# Altium PCB PCB.PcbDoc
Units mm, origin at the board's own origin, x right, y up, seen from the top; angles counter-clockwise.
Board outline 30 x 35.5 mm, 4 copper layers (Top Layer, GND Layer, PWR Layer, Bottom Layer), stack 1.57 mm thick; 43 components, 55 nets, 246 pads, 101 vias.
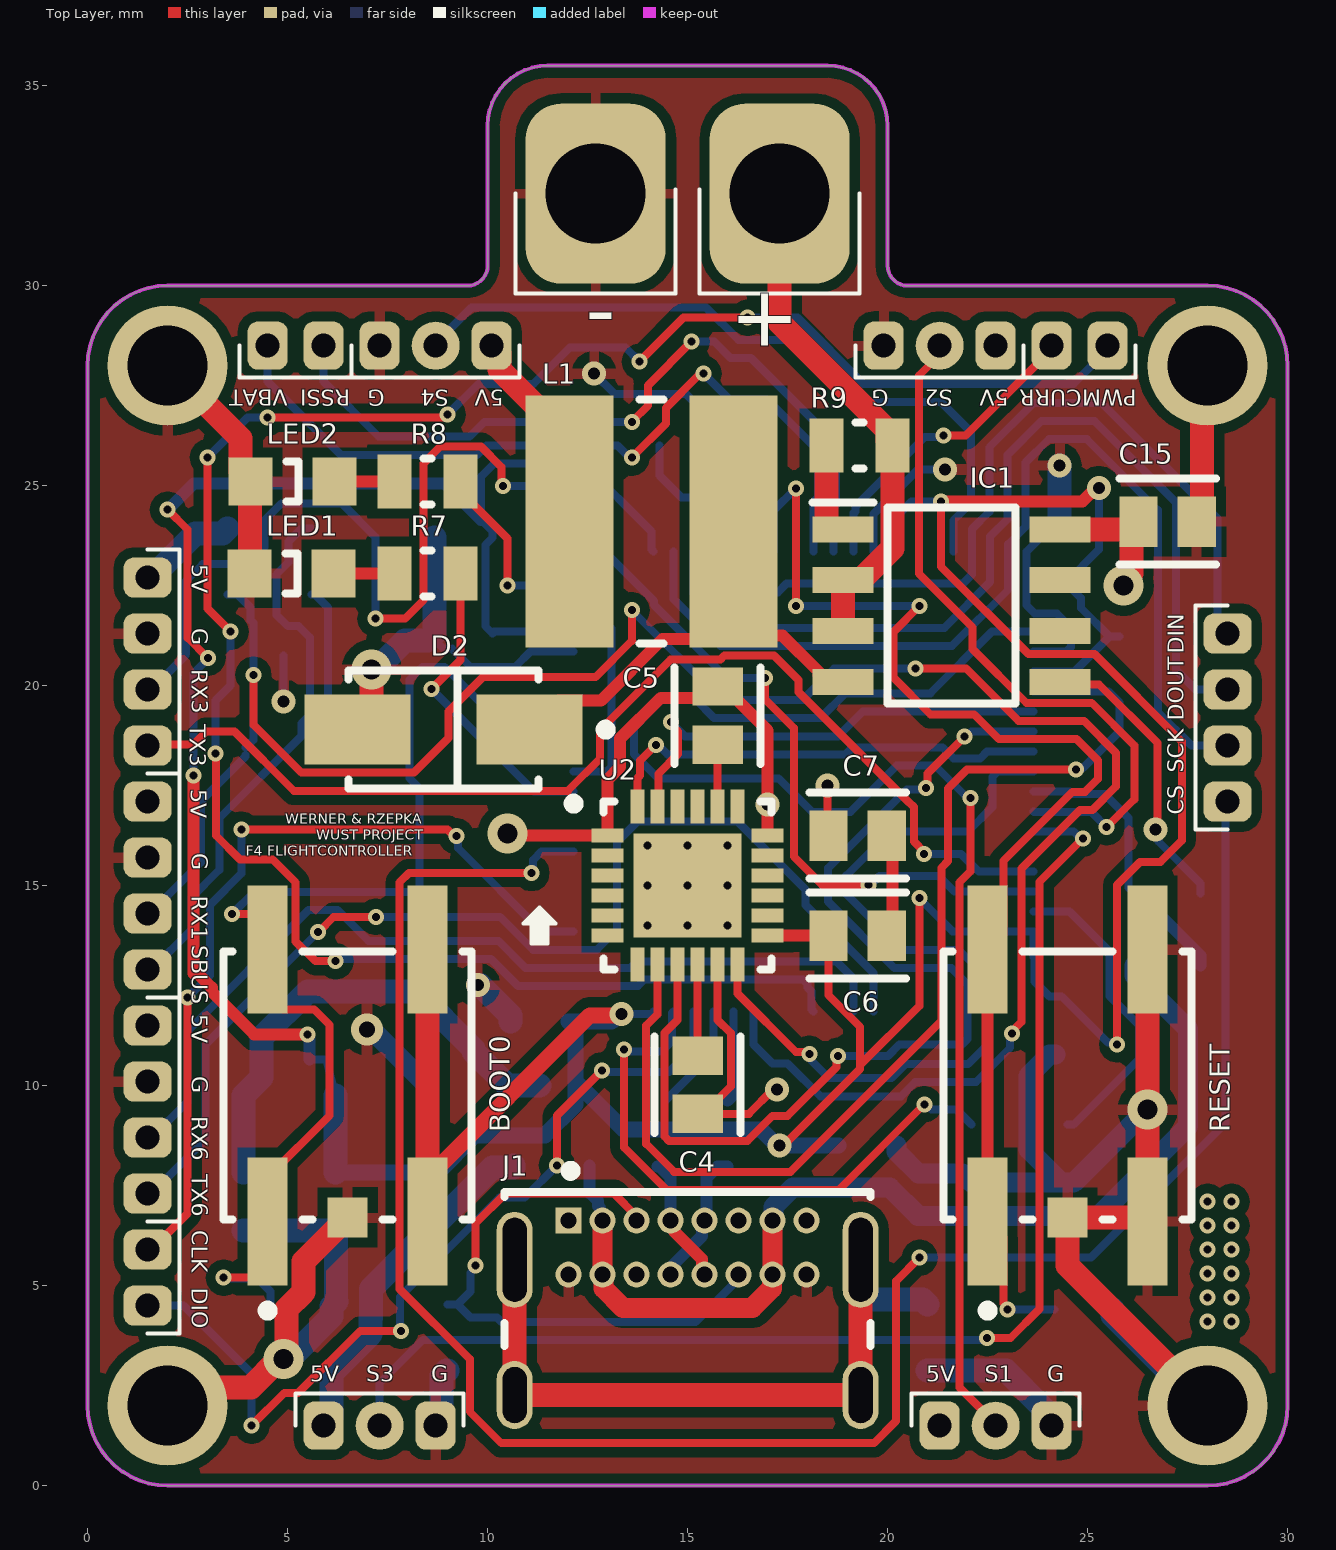
[diagram p0: Top Layer view]
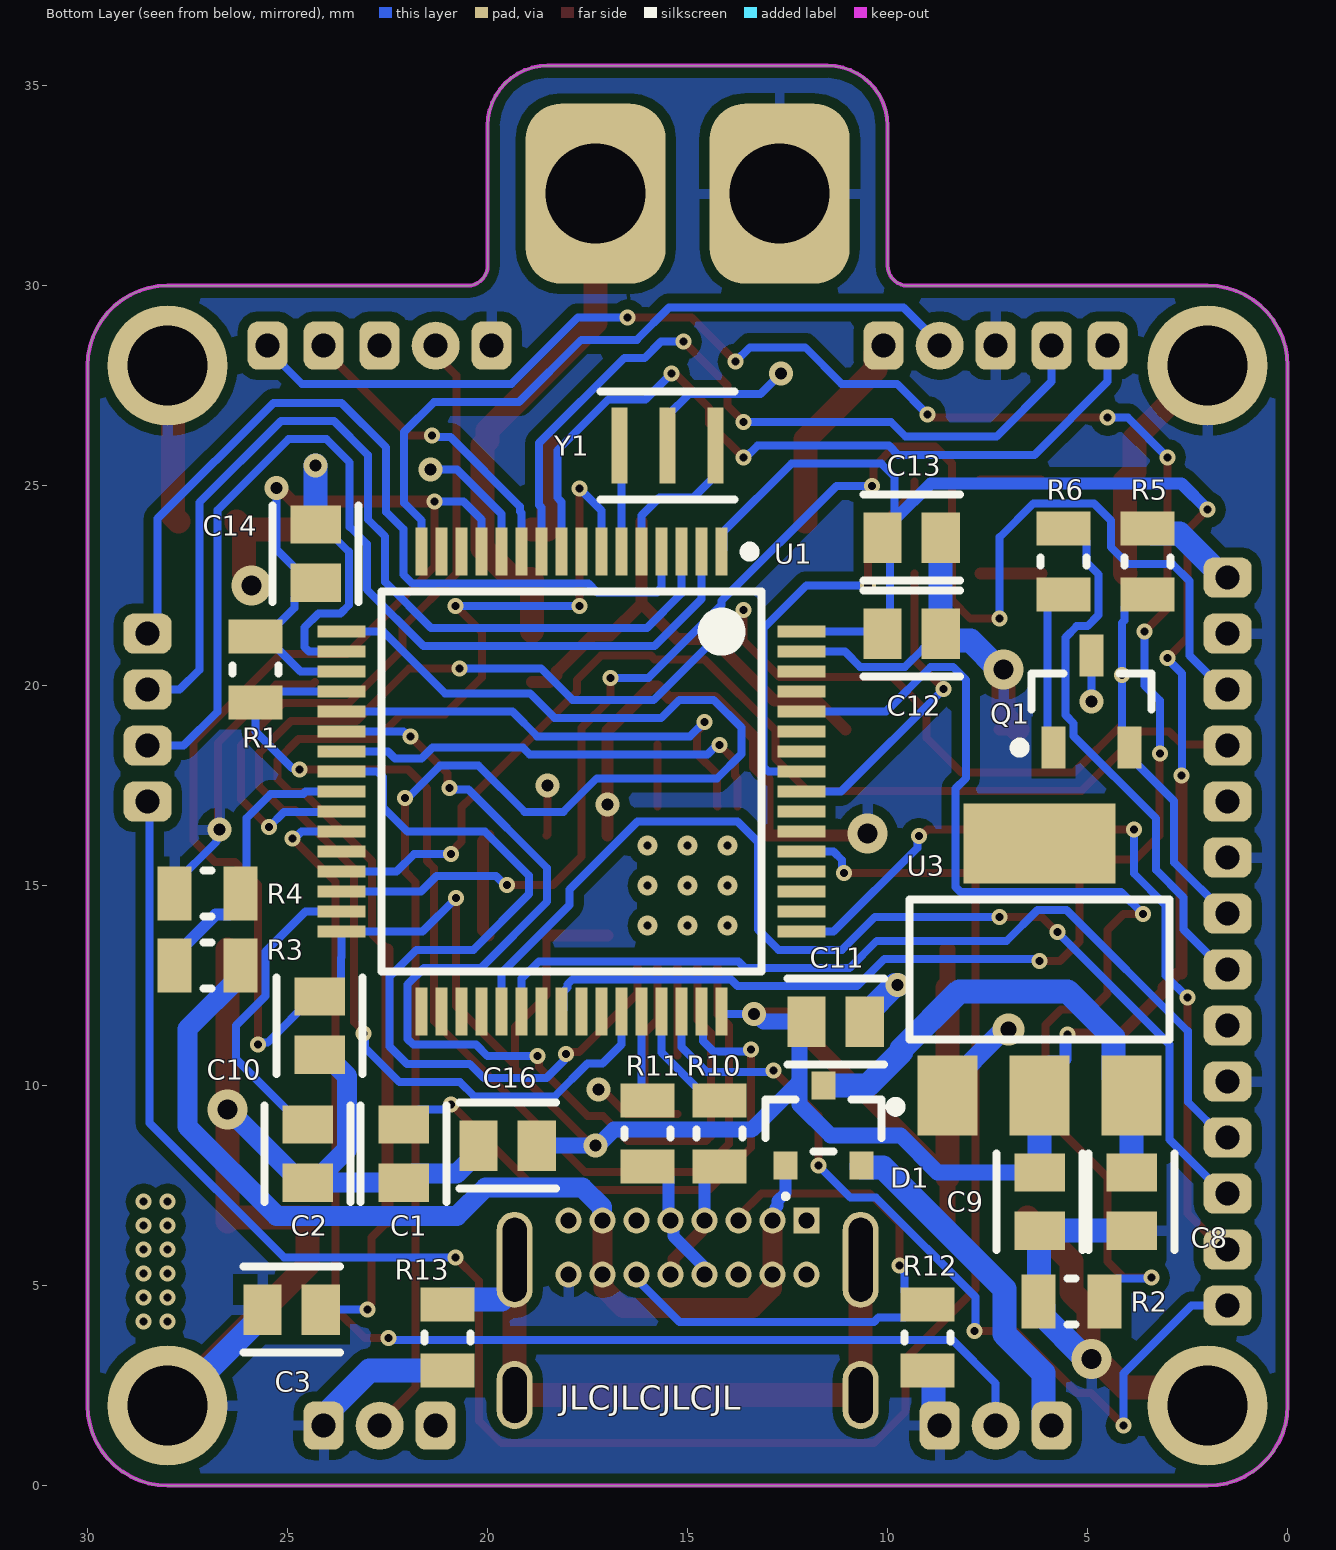
[diagram p1: Bottom Layer view, seen from below]
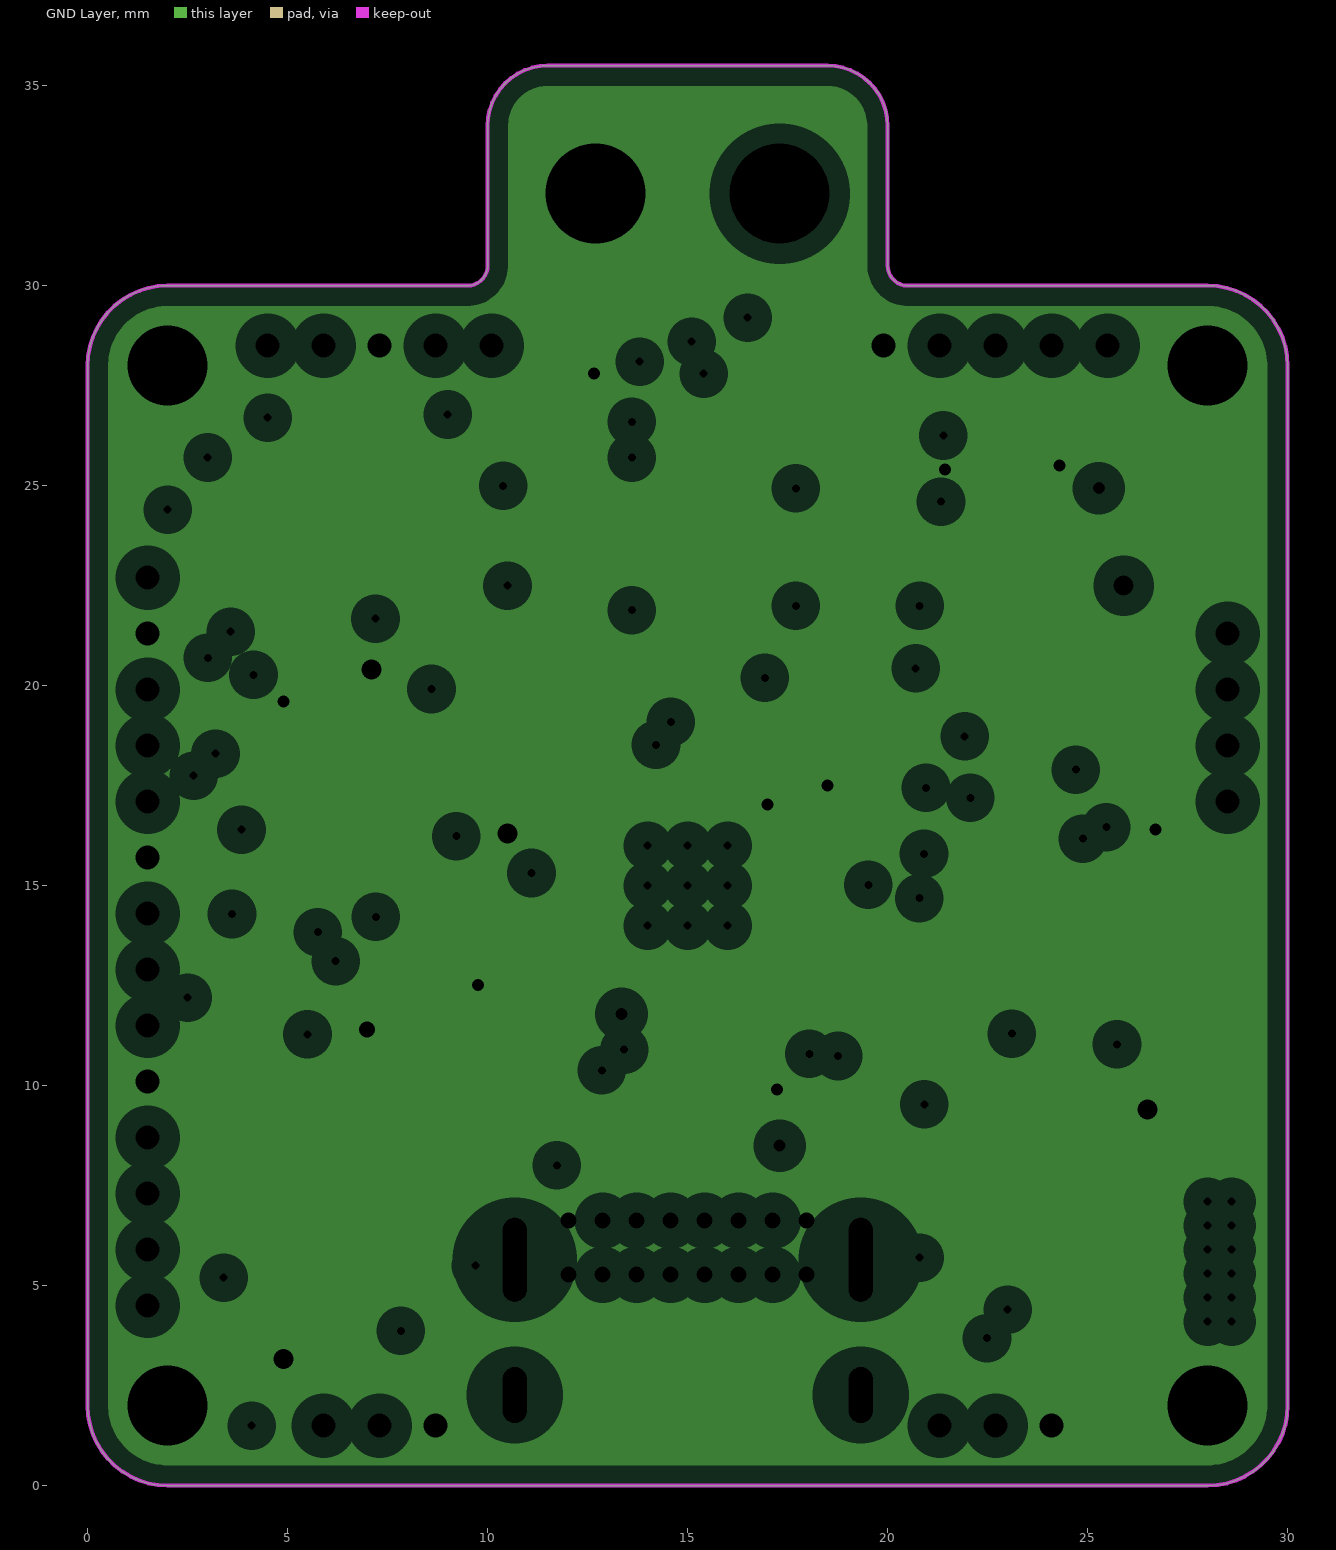
[diagram p2: GND Layer, clearances drawn from the general rule]
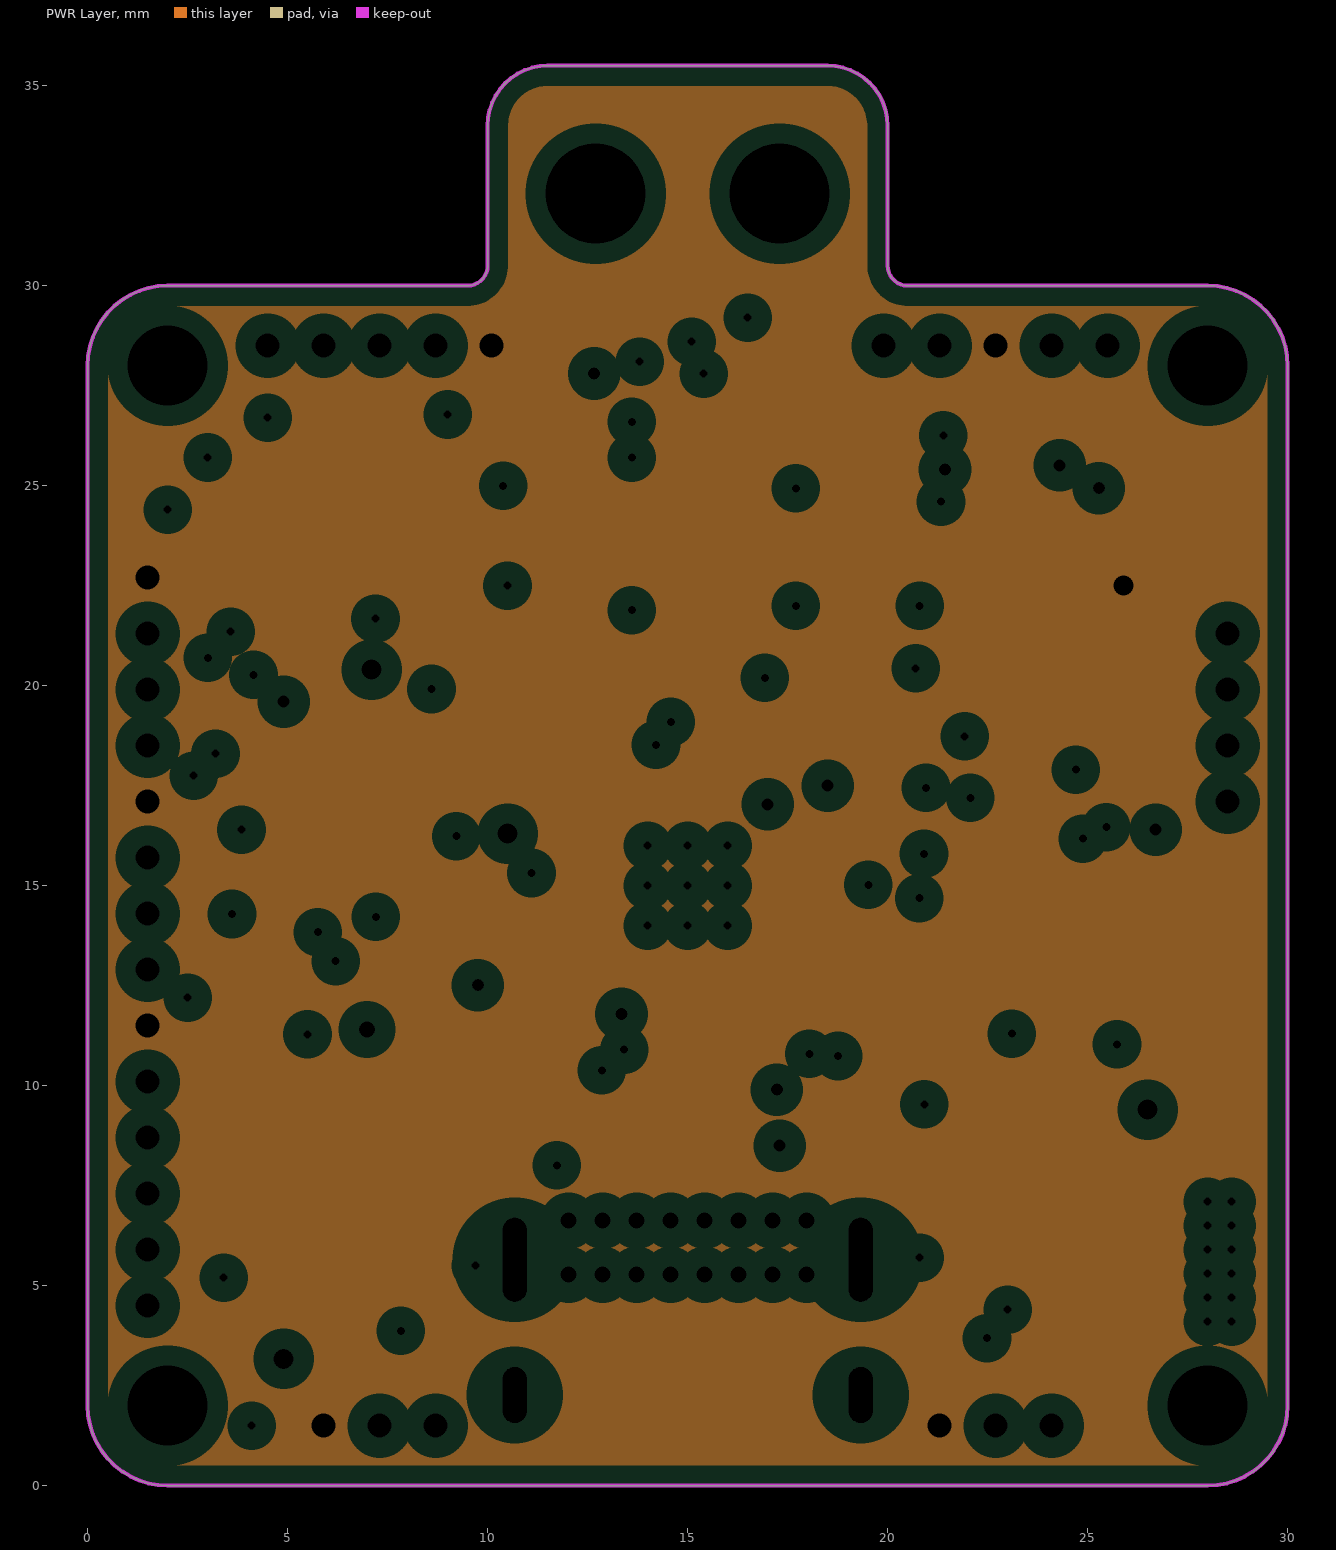
[diagram p3: PWR Layer, clearances drawn from the general rule]
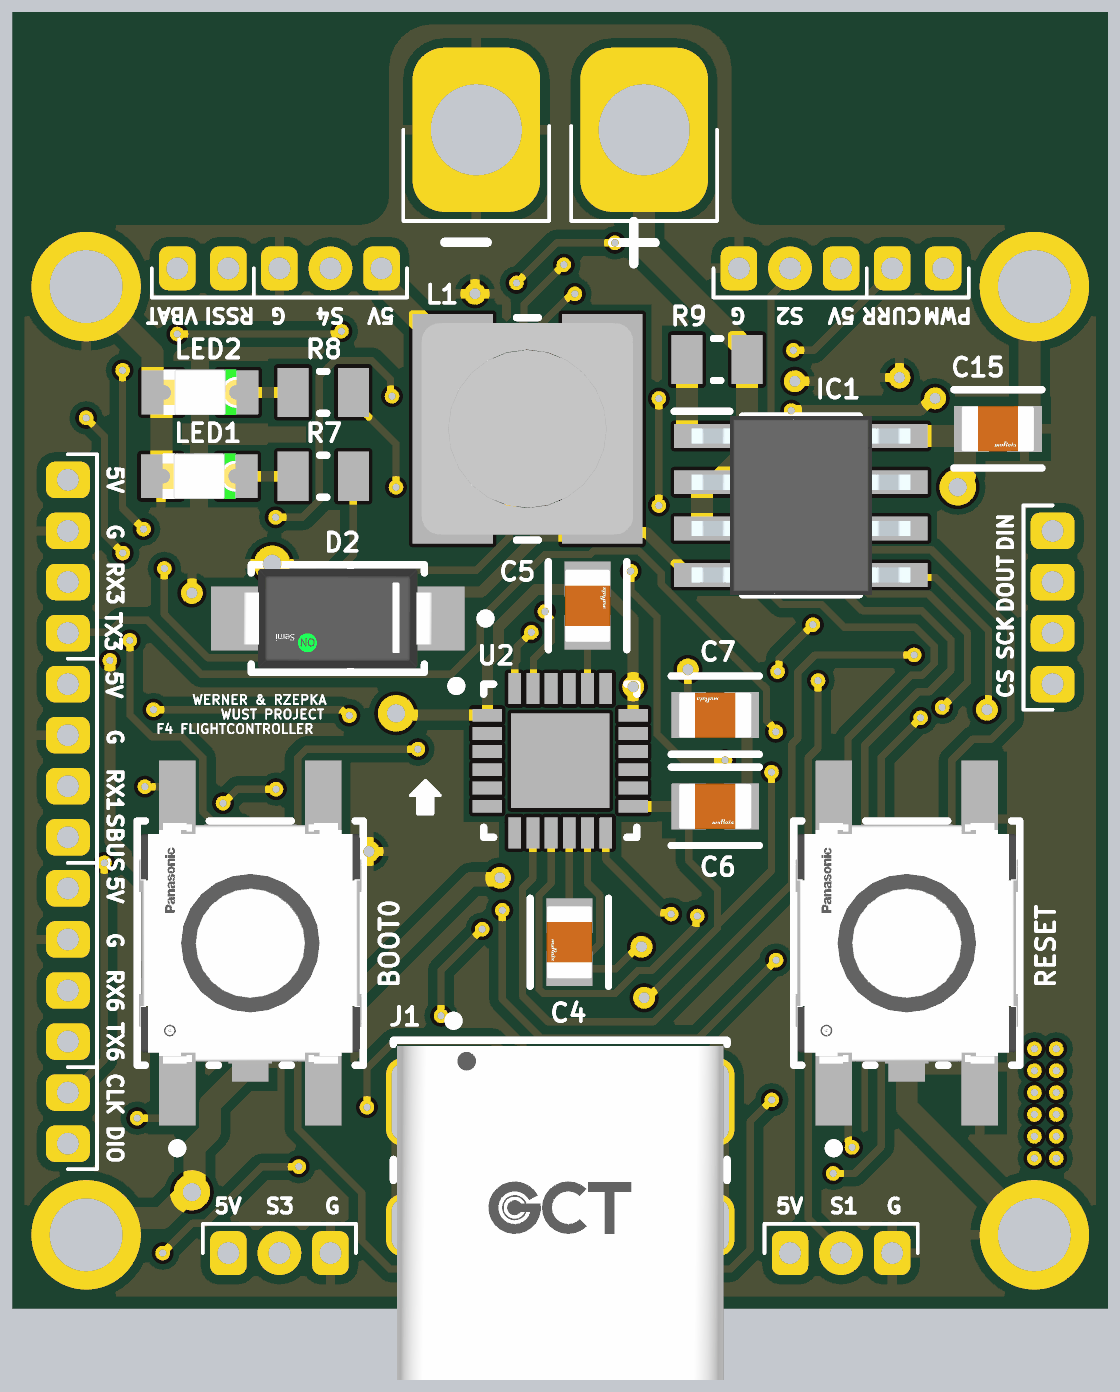
[diagram p4: 3D render of the assembled board from above, using the file's embedded part models]

## Layer stack, top to bottom
Top Solder: solder mask 0.0254, SM-001, Dk 3.8
Top Layer: signal copper 0.035
Dielectric 2: prepreg 0.2, PP-022, Dk 4.6
GND Layer: plane copper 0.0175, net GND
Dielectric 3: core 1.065, Core-042, Dk 4.6
PWR Layer: plane copper 0.0175, net +5
Dielectric 4: prepreg 0.2, PP-022, Dk 4.6
Bottom Layer: signal copper 0.035
Bottom Solder: solder mask 0.0254, SM-001, Dk 3.8

## Board outline
2,0 cw(c2,2) 0,2 0,28 cw(c2,28) 2,30 9.5,30 ccw(c9.5,30.5) 10,30.5 10,34 cw(c11.5,34) 11.5,35.5 18.5,35.5 cw(c18.5,34) 20,34 20,30.5 ccw(c20.5,30.5) 20.5,30 28,30 cw(c28,28) 30,28 30,2 cw(c28,2) 28,0

## Design rules (kind name [scope] priority, off if disabled: settings)
Clearance [All] p1: gap=0.254 ignorepadtopadclearanceinfootprint=TRUE except(0.1: Arc-SMDPad Track-SMDPad; 0.25: Arc-Hole Track-Hole SMDPad-Hole THPad-Hole Via-Hole Fill-Hole Poly-Hole Region-Hole Text-Hole)
PlaneClearance [All] p1: clearance=0.508
PlaneConnect [All] p1: planeconnectstyle=Relief reliefexpansion=0.508 reliefentries=4 reliefconductorwidth=0.254 reliefairgap=0.254
PolygonConnect [All] p1: connectstyle=Relief reliefconductorwidth=0.254 reliefentries=4 polygonreliefangle="90 Angle" airgapwidth=0.254
RoutingVias [All] p1: holewidth=0.3 width=0.6 viastyle="Through Hole" minholewidth=0.2 minwidth=0.4 maxholewidth=0.5 maxwidth=1
SolderMaskExpansion [All] p1: expansion=0.102 istentingtop=FALSE
ViasUnderSMD [All] p1: allowed=FALSE
Width [All] p1: maxlimit=0.6 minlimit=0.1 preferedwidth=0.2
28 further rules are at their usual default settings.

## Classes and differential pairs
component class "USB2.0 Type C Connection": C16 J1 R10 R11 R12 R13
component class "SBUS Inverter": Q1 R5 R6
component class "MPU-6000 Gyro": C4 C5 C6 C7 U2
component class "MCU Power": C10 C11 C12 C13 C14
component class "LED Status": LED1 LED2 R7 R8
component class "F4 DFC": BOOT0 C1 C2 C3 R1 R2 R3 R4 RESET U1 Y1
component class "5V Regulator": C15 D2 IC1 L1 R9
component class "3.3V Regulator": C8 C9 D1 U3

## Components (designator, comment, footprint, x,y, rotation, side; value= is the part's Value field where it differs from the comment)
BOOT0 "EVQQ2202W" FP-EVQQ2202W-MFG 6.5,10 r270 top
C1 "Cap 0805" FP-GRM216-0_1-IPC_C 22.1,8.3 r270 bottom value=2.2uF
C2 "Cap 0805" FP-GRM216-0_1-IPC_C 24.5,8.3 r270 bottom value=2.2uF
C3 "Cap 0805" FP-GRM216-0_1-IPC_C 24.9,4.4 r0 bottom value=0.1uF
C4 "Cap 0805" FP-GRM216-0_1-IPC_C 15.25,10.023 r270 top value=0.1uF
C5 "Cap 0805" FP-GRM216-0_1-IPC_C 15.75,19.25 r90 top value=2.2nF
C6 "Cap 0805" FP-GRM216-0_1-IPC_C 19.25,13.75 r0 top value=0.1uF
C7 "Cap 0805" FP-GRM216-0_1-IPC_C 19.25,16.25 r180 top value=1uF
C8 "Cap 0805" FP-GRM216-0_1-IPC_C 3.9,7.1 r270 bottom value=10uF
C9 "Cap 0805" FP-GRM216-0_1-IPC_C 6.2,7.1 r270 bottom value=10uF
C10 "Cap 0805" FP-GRM216-0_1-IPC_C 24.2,11.5 r270 bottom value=100nF
C11 "Cap 0805" FP-GRM216-0_1-IPC_C 11.3,11.6 r180 bottom value=100nF
C12 "Cap 0805" FP-GRM216-0_1-IPC_C 9.4,21.3 r180 bottom value=100nF
C13 "Cap 0805" FP-GRM216-0_1-IPC_C 9.4,23.7 r180 bottom value=100nF
C14 "Cap 0805" FP-GRM216-0_1-IPC_C 24.3,23.3 r90 bottom value=100nF
C15 "Cap 0805" FP-GRM216-0_1-IPC_C 27,24.1 r0 top value=10uF
C16 "Cap 0805" FP-GRM216-0_1-IPC_C 19.5,8.5 r0 bottom value=0.1uF
D1 "BAT54C" NXP-SOT23-3_V 11.6,9 r0 bottom
D2 "SS14" FP-403AE-MFG 8.9,18.9 r0 top
IC1 "LT1110CS8-5#PBF" SOIC127P599X175-8N 21.6,22 r0 top
J1 "USB4085-GF-A" FP-USB4085-GF-A-MFG 15,2.6 r0 top
L1 "744053470" WE-TPC-5828-LH 14.1,24.1 r180 top
LED1 "LED 0805" 0805_A 5.1,22.8 r180 top
LED2 "LED 0805" 0805_A 5.125,25.1 r180 top
Q1 "BC857C" INF-SOT23_N 4.9,19.6 r90 bottom
R1 "Res 0805" RESC2013X50X30LL20T20 25.8,20.4 r90 bottom value=10K
R2 "Res 0805" RESC2013X50X30LL20T20 5.4,4.6 r180 bottom value=10K
R3 "Res 0805" RESC2013X50X30LL20T20 27,13 r0 bottom value=10K
R4 "Res 0805" RESC2013X50X30LL20T20 27,14.8 r180 bottom value=10K
R5 "Res 0805" RESC2013X50X30LL20T20 3.5,23.1 r90 bottom value=10K
R6 "Res 0805" RESC2013X50X30LL20T20 5.6,23.1 r90 bottom value=4.7K
R7 "Res 0805" RESC2013X50X30LL20T20 8.5,22.8 r180 top value=1K
R8 "Res 0805" RESC2013X50X30LL20T20 8.5,25.1 r180 top value=1K
R9 "Res 0805" RESC2013X50X30LL20T20 19.3,26 r0 top value=220
R10 "Res 0805" RESC2013X50X30LL20T20 14.2,8.8 r270 bottom value=22
R11 "Res 0805" RESC2013X50X30LL20T20 16,8.8 r270 bottom value=22
R12 "Res 0805" RESC2013X50X30LL20T20 9,3.7 r270 bottom value=5.1K
R13 "Res 0805" RESC2013X50X30LL20T20 21,3.7 r270 bottom value=1M
RESET "EVQQ2202W" FP-EVQQ2202W-MFG 24.5,10 r270 top
U1 "STM32F405RGT6" STM-LQFP64_V 17.9,17.6 r270 bottom
U2 "MPU-6000" INSE-QFN-24_V 15,15 r0 top
U3 "NCP1117ST33T3G" ONSC-SOT-223-4-318H-01_A_V 6.2,12.9 r90 bottom
Y1 "CSTNE8M00GH5C000R0" FP-CSTNE8M00GH5C000R0-MFG 15.5,26 r180 bottom value=8MHz

## Footprints (in the part's own frame and the unit in brackets; to place one, negate y for a bottom-side part, rotate by r counter-clockwise, add the part's x,y. Pads: shape width x height; smd on the part's side, far side on the other; paste and mask are expansions set on the pad)
0805_A [mm] "Chip LED, 2-Leads, Body 2.0x1.3mm, IPC Medium Density"
  rect 1.1x1.2 smd: 1(-1.05,0) 2(1.05,0)
  silkscreen extent -0.15,-0.5 0.15,0.5, body extent -1,-0.62 1,0.63, height 0.68
FP-403AE-MFG [mm]
  rect 2.65x1.75 smd paste+0 mask+0: 1(-2.15,0) 2(2.15,0)
  silkscreen extent -2.37,-1.48 4.18,1.48, body extent -3.57,-1.58 3.57,1.58, height 0.25
FP-CSTNE8M00GH5C000R0-MFG [mm]
  rect 0.4x1.9 smd paste+0 mask+0: 1(1.2,0) 2(0,0) 3(-1.2,0)
  silkscreen extent -1.68,-1.35 1.68,1.35, body extent -1.6,-0.65 1.6,0.65, height 0.8
FP-EVQQ2202W-MFG [mm]
  rect 1x1 smd paste+0 mask+0: 1(3.3,0)
  rect 3.2x1 smd paste+0 mask+0: A(3.4,-2) A'(-3.4,-2) B(3.4,2) B'(-3.4,2)
  silkscreen extent -3.35,-3.1 5.75,3.1, body extent -5.1,-3.2 5.1,3.2, height 0.25
FP-GRM216-0_1-IPC_C [mm]
  rect 0.958x1.261 smd paste+0 mask+0: 1(-0.727,0) 2(0.727,0)
  silkscreen extent -1.21,-1.07 1.21,1.07, body extent -1,-0.63 1,0.63, height 0.7
FP-USB4085-GF-A-MFG [mm]
  rrect100% 0.9x2.4 hole 2.1 slot 0.6 at 0 deg paste-1000 mask+0: 1(-4.325,3.045) 2(4.325,3.045)
  rrect100% 0.9x1.7 hole 1.4 slot 0.6 at 0 deg paste-1000 mask+0: 3(-4.325,-0.335) 4(4.325,-0.335)
  rect 0.65x0.65 hole 0.4 paste-1000 mask+0: A1(-2.975,4.025)
  round 0.65 hole 0.4 paste-1000 mask+0: A4(-2.125,4.025) A5(-1.275,4.025) A6(-0.425,4.025) A7(0.425,4.025) A8(1.275,4.025) A9(2.125,4.025) A12(2.975,4.025) B1(2.975,2.675) B4(2.125,2.675) B5(1.275,2.675) B6(0.425,2.675) B7(-0.425,2.675) B8(-1.275,2.675) B9(-2.125,2.675) B12(-2.975,2.675)
  silkscreen extent -4.57,0.89 4.57,5.39, body extent -4.87,-4.83 4.87,4.83, height 0.25
INF-SOT23_N [mm] "SOT23, 3-Leads, Body 2.9x1.3 mm, Pitch 0.95 mm, IPC Medium Density"
  rect 1.05x0.6 smd: 1(-1.15,0.95) 2(-1.15,-0.95) 3(1.15,0)
  silkscreen extent -1.27,-1.5 0.7,1.93, body extent -0.7,-1.5 0.7,1.5, height 1.1
INSE-QFN-24_V [mm] "QFN, 24-Leads, Body 4.00x4.00mm, Pitch 0.50mm, Thermal Pad 2.7x2.6mm"
  rect 0.8x0.35 smd: 1(-2,1.25) 2(-2,0.75) 3(-2,0.25) 4(-2,-0.25) 5(-2,-0.75) 6(-2,-1.25) 13(2,-1.25) 14(2,-0.75) 15(2,-0.25) 16(2,0.25) 17(2,0.75) 18(2,1.25)
  rect 0.35x0.85 smd: 7(-1.25,-1.975) 8(-0.75,-1.975) 9(-0.25,-1.975) 10(0.25,-1.975) 11(0.75,-1.975) 12(1.25,-1.975) 19(1.25,1.975) 20(0.75,1.975) 21(0.25,1.975) 22(-0.25,1.975) 23(-0.75,1.975) 24(-1.25,1.975)
  rect 2.7x2.6 smd: 25(0,0)
  silkscreen extent -2.97,-2.1 2.1,2.17, body extent -2,-2 2,2, height 0.95
NXP-SOT23-3_V [mm] "SOT23, 3-Leads, Body 1.3x2.9mm, Pitch 0.95mm"
  rect 0.6x0.7 smd paste-0.05: 1(0.95,1) 2(-0.95,1) 3(0,-1)
  silkscreen extent -1.45,-0.65 1.45,1.79, body extent -1.45,-0.65 1.45,0.65, height 1.1
ONSC-SOT-223-4-318H-01_A_V [mm] "SOT223, 4-Leads, Body 6.5x3.5mm, Pitch 2.3mm"
  rect 2x1.5 smd: 1(-3.15,2.3) 2(-3.15,0) 3(-3.15,-2.3)
  rect 2x3.8 smd: 4(3.15,0)
  silkscreen extent -3.55,-3.25 1.75,3.73, body extent -1.75,-3.25 1.75,3.25, height 1.8
RESC2013X50X30LL20T20 [mm] "Chip Resistor, 2-Leads, Body 2.00x1.25mm, IPC High Density"
  rect 0.85x1.35 smd: 1(-0.825,0) 2(0.825,0)
  silkscreen extent -0.1,-0.58 0.1,0.58, body extent -1.1,-0.72 1.1,0.72, height 0.5
SOIC127P599X175-8N [mm]
  rect 1.526x0.65 smd: 1(-2.712,1.905) 2(-2.712,0.635) 3(-2.712,-0.635) 4(-2.712,-1.905) 5(2.712,-1.905) 6(2.712,-0.635) 7(2.712,0.635) 8(2.712,1.905)
  silkscreen extent -3.47,-2.45 1.6,2.58, body extent -3,-2.45 3,2.45, height 1.75
STM-LQFP64_V [mm] "Thin QFP, 64-Leads, Body 10x10mm, Pitch 0.5mm, ST Recommended"
  rect 1.2x0.3 smd: 1(-5.75,3.75) 2(-5.75,3.25) 3(-5.75,2.75) 4(-5.75,2.25) 5(-5.75,1.75) 6(-5.75,1.25) 7(-5.75,0.75) 8(-5.75,0.25) 9(-5.75,-0.25) 10(-5.75,-0.75) 11(-5.75,-1.25) 12(-5.75,-1.75) 13(-5.75,-2.25) 14(-5.75,-2.75) 15(-5.75,-3.25) 16(-5.75,-3.75) 33(5.75,-3.75) 34(5.75,-3.25) 35(5.75,-2.75) 36(5.75,-2.25) 37(5.75,-1.75) 38(5.75,-1.25) 39(5.75,-0.75) 40(5.75,-0.25) 41(5.75,0.25) 42(5.75,0.75) 43(5.75,1.25) 44(5.75,1.75) 45(5.75,2.25) 46(5.75,2.75) 47(5.75,3.25) 48(5.75,3.75)
  rect 0.3x1.2 smd: 17(-3.75,-5.75) 18(-3.25,-5.75) 19(-2.75,-5.75) 20(-2.25,-5.75) 21(-1.75,-5.75) 22(-1.25,-5.75) 23(-0.75,-5.75) 24(-0.25,-5.75) 25(0.25,-5.75) 26(0.75,-5.75) 27(1.25,-5.75) 28(1.75,-5.75) 29(2.25,-5.75) 30(2.75,-5.75) 31(3.25,-5.75) 32(3.75,-5.75) 49(3.75,5.75) 50(3.25,5.75) 51(2.75,5.75) 52(2.25,5.75) 53(1.75,5.75) 54(1.25,5.75) 55(0.75,5.75) 56(0.25,5.75) 57(-0.25,5.75) 58(-0.75,5.75) 59(-1.25,5.75) 60(-1.75,5.75) 61(-2.25,5.75) 62(-2.75,5.75) 63(-3.25,5.75) 64(-3.75,5.75)
  silkscreen extent -5.87,-4.75 4.75,4.75, body extent -5,-5 5,5, height 1.6
WE-TPC-5828-LH [mm] "SMD Inductor, 2-Leads, Body 5.8 x 5.8 mm"
  rect 2.2x6.3 smd: 1(-2.05,0) 2(2.05,0)
  silkscreen extent -0.3,-3.05 0.3,3.05, body extent -2.9,-2.9 2.9,2.9, height 2.79

## Part data
BOOT0 RESET: library part CMP-05618-000131-1, "SWITCH TACTILE SPST-NO 0.02A 15V", Actuator Color=White, Case/Package=SMD/SMT, Contact Current Rating=20mA, Contact Resistance=100mR, Max Operating Temperature=85°C, Max Voltage Rating (AC)=250V, Max Voltage Rating (DC)=15V, Min Operating Temperature=-40°C, Operating Force=3.5N, Package Quantity=1, Actuator Length=0.7mm, Actuator Type=Standard, Body Depth=6mm, Color=White, Contact Plating=Silver, Current Rating=20mA, Depth=6.6mm, Electrical Life=100000Cycles, Illumination Type=Non-Illuminated, Lead Free="Lead Free", Length=6mm, Max Current Rating=20mA, Mechanical Life=100000Cycles, Mount="Surface Mount", Orientation=Straight, Packaging="Tape and Reel", Radiation Hardening=No, REACH SVHC="No SVHC", RoHS Compliant=Yes, Series=EVQQ2, Size=1.8mm, Switch Function=Off-Mom, Switch Travel=0.25mm, Termination=SMD/SMT, Thickness=1.8mm, Throw Configuration=SPST, Voltage Rating (AC)=250V, Voltage Rating (DC)=15V
C1 C2 C3 C4 C5 C6 C7 C8 C9 C10 C11 C12 C13 C14 C15 C16: library part CMP-2007-00889-2, "Capacitor", Capacitance=100nF, Case Code (Imperial)=0805, Case/Package=0805, Mount="Surface Mount"
D1: library part CMP-0417-00003-1, "Schottky Barrier Diode, 30 V, 2 uA, -55 to 150 degC, 3-Pin SOT23, RoHS, Tape and Reel", Manufacturer="NXP Semiconductors", Temperature Range="-55 to 150 degC", Cd (pF)=10, ComponentLink1Description="Manufacturer URL", ComponentLink1URL=http://www.nxp.com/, ComponentLink2Description=Datasheet, ComponentLink2URL=http://www.nxp.com/documents/data_sheet/BAT54_SER.pdf, DatasheetVersion="Rev. 5", IR (uA)=2, Mounting Technology="Surface Mount", PackageDescription="3-Pin Plastic Surface-mounted Package, Body 1.3 x 2.9 mm, Pitch 0.95 mm", PackageReference=SOT23-3, Packing="Tape and Reel", PartNumber=BAT54C, RoHS=TRUE, Rth(j-a) (K/W)=500, Trr (ns)=5, VF (mV)=800, VR (V)=30
D2: library part CMP-2000-04943-2, "DIODE SCHOTTKY 40V 1A SMA", Forward Current=1A, Manufacturer="ON Semiconductor", Max Junction Temp=+125°C, Max Repetitive Reverse Voltage=40V, Max Surge Forward Current=40A, Package=403AE, Peak Reverse Current=0.2mA, Temperature="-65°C to +125°C", Temperature Range Low=-65°C, Automotive=No, Category=Diode, ComponentLink2Description=Datasheet, ComponentLink2URL=https://www.onsemi.com/pub/Collateral/SS19-D.PDF, Device Class L1="Discrete Semiconductors", Device Class L2=Diodes, Device Class L3="Schottky Diodes", Digikey Description="DIODE SCHOTTKY 40V 1A SMA", Height=2.5mm, Lead Free=Yes, Manufacturer Part Number=SS14, Mouser Description="Schottky Diodes & Rectifiers SMA 40V 1.0A", Octopart=https://octopart.com/ss14-on+semiconductor-29205033, RoHS=TRUE, Standoff Height=0.05mm, Temperature Range High=+125°C
IC1: library part LT1110CS8#PBF, "Conv DC-DC 1V to 30V Non-Inv/Inv/Step Up/Step Down Single-Out 5V Micropower 8-Pin SOIC N Tube", Manufacturer_Name="Linear Technology", Mouser Part Number=584-LT1110CS8-5#PBF, Supplier Part Number 1=584-LT1110CS8#PBF, Datasheet Link=https://www.analog.com/media/en/technical-documentation/data-sheets/lt1110.pdf, Height=1.752mm, Manufacturer_Part_Number=LT1110CS8-5#PBF, Mouser Price/Stock=https://www.mouser.com/Search/Refine.aspx?Keyword=584-LT1110CS8%23PBF, Supplier 1=Mouser
J1: library part CMP-196119-000001-1, "CONN RCPT USB2.0 TYPEC 16POS", Current Rating=4.25A, Manufacturer="Global Connector Technology", Package=0, Temperature="-40°C to +85°C", Temperature Range High=+85°C, Temperature Range Low=-40°C, Voltage Rating=20V, Automotive=No, Category=Conn, ComponentLink2Description=Datasheet, ComponentLink2URL=https://gct.co/files/drawings/usb4085.pdf, Conn Orientation="Right Angle", Contact Material=Gold,Nickel, Device Class L1=Connectors, Device Class L2="USB Connectors", Device Class L3=unset, Digikey Description="CONN RCPT USB2.0 TYPEC 16POS", Height=3.66mm, Is Female=yes, Lead Free=Yes, Manufacturer Part Number=USB4085-GF-A, Number Of Contacts=16, Octopart=https://octopart.com/usb4085-gf-a-global+connector+technology-94773699, Pitch=0.85mm, RoHS=TRUE, Shielding=true, Usb Standard="USB 2.0"
L1: library part CMP-0227-00413-1, "SMD Shielded Tiny Power Inductor WE-TPC, L = 47.0 µH", Inductance="47.0 ÂµH", ComponentLink1Description="Manufacturer Link", ComponentLink1URL=http://www.we-online.com, ComponentLink2Description=Datasheet, ComponentLink2URL=http://www.we-online.de/katalog/media/pdf/744053470.pdf, DatasheetVersion="ver 6, Aug-2010", PackageDescription="SMD Inductor, 2-Leads, Body 5.8 x 5.8 mm", PackageReference=WE-TPC-5828-LH, PackageVersion=2010
LED1 LED2: library part CMP-1426-00010-1, "LED", Color="Super Red", Manufacturer="Wuerth Elektronik", PartNumber=150080SS75000, ComponentLink1Description="Manufacturer URL", ComponentLink1URL=http://www.we-online.com, ComponentLink2Description=Datasheet, ComponentLink2URL=http://katalog.we-online.com/led/datasheet/150080SS75000.pdf, PackageReference=0805_A
Q1: library part CMP-1177-00039-1, "PNP Silicon AF Transistor, 45 V VCEO, 100 mA IC, SOT23, Reel, Green", Manufacturer=Infineon, ComponentLink1Description="Manufacturer URL", ComponentLink1URL=http://www.infineon.com/, ComponentLink2Description=Datasheet, ComponentLink2URL=http://www.infineon.com/dgdl/bc857series_bc858series_bc859series_bc860series.pdf?folderId=db3a304314dca389011541d30fa21656&fileId=db3a304314dca389011541da0e3a1661, ComponentLink3Description="Package Specification", ComponentLink3URL=http://www.infineon.com/dgdl/SOT23-Package_Overview.pdf?folderId=db3a30431936bc4b0119532290053c66&fileId=db3a30431936bc4b0119533468123c85, fT (typ)="250Â MHz", Green=TRUE, IBM (max)="200Â mA", IC (max)="100Â mA", ICBO (max)="15Â nA", ICM (max)="200Â mA", Mounting Technology="Surface Mount", PackageDescription="3-Pin Small Outline Transistor Package, 1.3 x 2.9 mm Body, 0.95 mm Pitch", PackageReference=SOT23, PackageVersion=Apr-08, Packing=Reel, PartNumber=BC857C, Polarity=PNP, Ptot (max)="330Â mW", VCBO (max)="50Â V", VCEO (max)="45Â V", VEBO (max)="5Â V"
R1 R2 R3 R4 R5 R6 R7 R8 R9 R10 R11 R12 R13: library part CMP-2001-03735-1, "Resistor"
U1: library part CMP-0243-00019-3, "ARM Cortex-M4 32-bit MCU+FPU, 210 DMIPS, 1024 kB Flash, 192 kB Internal RAM, 51 I/Os, 64-pin LQFP, -40 to 85 degC, Tray", I/Os (High Current)=51, Manufacturer=STMicroelectronics, Operating Frequency(F) (Processor speed) (MHz)=168, Supply Voltage(Vcc) max (V)=3.6, Supply Voltage(Vcc) min (V)=1.8, ComponentLink1Description="Manufacturer URL", ComponentLink1URL=http://www.st.com/web/en/home.html, ComponentLink2Description=Datasheet, ComponentLink2URL=http://www.st.com/st-web-ui/static/active/en/resource/technical/document/datasheet/DM00037051.pdf, ComponentLink3Description="Package Specification", ComponentLink3URL=http://www.st.com/st-web-ui/static/active/en/resource/technical/document/datasheet/DM00037051.pdf, Core="ARM Cortex-M4", D/A Converter=2x12-bit, DatasheetVersion="Rev. 4", FLASH Size (Prog) (kB)=1024, Internal RAM Size (kB)=192, Mounting Technology="Surface Mount", PackageDescription="64-Pin Low Profile Quad Flat Package, 10 x 10 mm Body, 0.5 mm Pitch", PackageReference=LQFP64, PackageVersion="Rev. 4, 06/2013", Packing=Tray, PartNumber=STM32F405RGT6
U2: library part CMP-2000-05008-1, "3-Axis Gyroscope 3-Axis Accelerometer Motion Processing Unit with I2C and SPI, 2.5, 3 or 3.3 V, -40 to 85 degC, 24-Pin QFN, RoHS, Tape and Reel", Manufacturer=InvenSense, Operating Temperature=-40degC~85degC(TA), Package Description="24-Pin Quad Flat No-lead Package, Body 4 x 4 mm, Pitch 0.5 mm", Package Reference=QFN-24, Standard Package=5,000, Category=Sensors,Transducers, Datasheet URL=https://www.invensense.com/wp-content/uploads/2015/02/MPU-6000-Datasheet1.pdf, Datasheet Version="Rev. 3.4, 08/2013", Family=Multifunction, Featured Product=MPU60006AxisIntegratedSPISolution, Manufacturer URL=http://www.invensense.com/, Online Catalog=MPU-6000™Series, Other Names="1428-1005-2 / MPU6000", Output Type=I²C,SPI, Sensor Type=Accelerometer,Gyroscope,3Axis
U3: library part CMP-1679-00010-1, "Low-Dropout Positive Fixed Voltage Regulator, 1 A, 3.3 V Output Voltage, 0 to 125 degC, 4-Pin SOT-223 (318H-01), Pb-Free, Tape and Reel", Case Code (Imperial)=0603, Case Code (Metric)=1608, Max Operating Temperature="155 degC", Min Operating Temperature="-55 degC", Package Quantity=5000, Power Rating="100 mW", Resistance="220 kohm", Tolerance=1%, Type (Resistor)="Thick Film", Voltage Rating="75 V", Case\Package=0603, ComponentLink1Description="Manufacturer URL", ComponentLink1URL=http://www.onsemi.com/, ComponentLink2Description=Datasheet, ComponentLink2URL=http://www.onsemi.com/pub_link/Collateral/NCP1117-D.PDF, DatasheetVersion="Rev. 27, 09/2014", Height="0.45 mm", Length="1.55 mm", Mount="Surface Mount", PackageDescription="4-Pin Small Outline Transistor, Body 6.5 x 3.5 mm, Pitch 2.3 mm", PackageReference=SOT-223-4-318H-01_A, Packaging="Tape and Reel", Radiation Hardening=No, REACH SVHC=Unknown, RoHSCompliant=true, Weight="7.1E-05 oz", Width="0.85 mm"
Y1: library part CMP-06057-000001-1, "CERAMIC RES 8.0000MHZ 33PF SMD", Capacitance=33pF, Case/Package=SMD/SMT, Frequency=8MHz, Frequency Stability=0.13%, Frequency Tolerance=0.07%, Max Operating Temperature=125°C, Min Operating Temperature=-40°C, Resistor Type=Ceramic, Impedance=40R, Mount="Surface Mount", Packaging="Tape and Reel"

## Free pads (board coordinates)
  rrect50% 3.5x4.5 hole 2.5 paste-1000 mask+0: +(17.3,32.3) -(12.7,32.3)
  rrect50% 1.2x1 hole 0.6 paste-1000 mask+0: Conn(1.5,4.5) Conn(1.5,5.9) Conn(1.5,7.3) Conn(1.5,8.7) Conn(1.5,10.1) Conn(1.5,11.5) Conn(1.5,12.9) Conn(1.5,14.3) Conn(1.5,15.7) Conn(1.5,17.1) Conn(1.5,18.5) Conn(1.5,19.9) Conn(1.5,21.3) Conn(1.5,22.7) Conn(28.5,17.1) Conn(28.5,18.5) Conn(28.5,19.9) Conn(28.5,21.3)
  rrect50% 1x1.2 hole 0.6 paste-1000 mask+0: Motor(4.5,28.5) Motor(5.9,1.5) Motor(5.9,28.5) Motor(7.3,28.5) Motor(8.7,1.5) Motor(10.1,28.5) Motor(19.9,28.5) Motor(21.3,1.5) Motor(22.7,28.5) Motor(24.1,1.5) Motor(24.1,28.5) Motor(25.5,28.5)
  round 1.2 hole 0.6 paste-1000 mask+0: Motor(7.3,1.5) Motor(8.7,28.5) Motor(21.3,28.5) Motor(22.7,1.5)
  round 3 hole 2 paste-1000 mask+0: MountBL(2,2) MountBR(28,2) MountTL(2,28) MountTR(28,28)

## Via types
v1: diameter 0.4, hole 0.2, Top Layer to Bottom Layer, 74 vias
v2: diameter 0.6, hole 0.3, Top Layer to Bottom Layer, 12 vias
v3: diameter 0.5, hole 0.2, Top Layer to Bottom Layer, 9 vias
v4: diameter 1, hole 0.5, Top Layer to Bottom Layer, 5 vias
v5: diameter 0.8, hole 0.4, Top Layer to Bottom Layer, 1 vias

## Nets (pads, with @x,y where several pads share a name; then routed paths per layer and width w, separated by ;. In a path a pad name is that pad's centre, name@x,y a point inside that pad or via, vN(x,y) a via of type N, cw(c..) or ccw(c..) an arc to the next point about the centre after c; other vN are vias at no path point)
+3.3: BOOT0.B BOOT0.B' C6.1 C9.1 C10.1 C11.1 C12.1 C13.1 C14.1 C16.1 R1.2 U1.1 U1.13 U1.19 U1.32 U1.48 U1.64 U2.13 U3.2 | length 122.7
  Top Layer w0.2: v1(2,24.4) 2.502,23.898 2.502,21.196 v1(3.005,20.694) ; v2(17.3,8.5) 17.396,8.5 19.312,10.416 19.312,10.512 ; C6.1 18.523,12.261 19.312,11.471 19.312,10.512 ; v1(20.792,14.686) 20.792,11.992 19.312,10.512 ; v1(21.333,24.6) 21.333,22.973 23.519,20.787 25.168,20.787 27.354,18.602 27.354,16.129 26.818,15.593 26.31,15.593 25.736,15.019 v1(25.736,11.034)
  Top Layer w0.3: v1(2.65,17.75) 2.65,12.804 2.75,12.804 3.104,12.45 3.104,12.342 4.163,11.283 v1(5.498,11.283) ; U2.13 C6.1 ; v1(21.333,24.6) 21.342,24.609 24.871,24.609 25.198,24.936 v2(25.28,24.936)
  Top Layer w0.4: BOOT0.B 8.5,7.7 12.554,11.754 13.308,11.754 v2(13.346,11.792) ; BOOT0.B'@8.5,12.633 BOOT0.B'
  Top Layer w0.6: BOOT0.B@8.5,7.7 BOOT0.B'@8.5,12.44
  Bottom Layer w0.2: v1(2.65,17.75) 2.642,17.758 2.642,20.3 3.005,20.663 v1(3.005,20.694) ; v1(5.498,11.283) 5.498,11.229 v1@5.55,11.177 ; U3.2@5.55,10.65 5.966,10.65 U3.2 ; U1.64 10.177,21.35 C12.1 9.942,21.485 9.942,23.515 C13.1 10.127,23.851 9.833,24.146 9.833,25.223 10.157,25.547 12.403,25.547 14.1,23.85 14.1,23.4 U1.1 ; v2@13.4,11.792 14.1,11.792 14.15,11.842 U1.48 ; U1.13 20.15,24.15 20.6,24.6 v1(21.333,24.6) ; v1(20.792,14.686) 21.628,13.85 U1.32 23.65,13.213 23.67,13.193 23.67,12.606 24.049,12.227 24.351,12.227 25.506,11.072 25.698,11.072 v1(25.736,11.034) ; U1.19 24.675,20.35 R1.2@25.55,21.225 ; C14.1 C14.1@24.451,22.573 ; v2(25.28,24.936) 25.28,23.401 C14.1@24.451,22.573 ; R1.2 R1.2@25.55,21.225 ; C14.1@24.451,22.573 24.83,22.194 24.83,21.945 R1.2@25.55,21.225
  Bottom Layer w0.3: v1(2,24.4) 2.654,25.054 8.925,25.054 C13.1@9.833,24.146 ; U3.2@5.55,10.65 v1@5.55,11.177
  Bottom Layer w0.4: C9.1 8.751,7.827 9.678,8.754 11.428,8.754 12.2,9.526 12.2,10.001 12.25,10.051 ; v2(13.346,11.792) 13.292,11.792 13.1,11.6 12.2,11.6 C11.1 12.2,11.427 12.2,10.101 12.25,10.051 ; C16.1 17.246,8.5 16.846,8.9 13.401,8.9 12.25,10.051
  Bottom Layer w0.6: C9.1 U3.2
+5: C15.1 D1.2 IC1.8 L1.2 pad.Conn@1.5,11.5 pad.Conn@1.5,17.1 pad.Conn@1.5,22.7 pad.Motor@5.9,1.5 pad.Motor@10.1,28.5 pad.Motor@21.3,1.5 pad.Motor@22.7,28.5 R5.2 | length 20
  Top Layer w0.6: pad.Motor@10.1,28.5 10.3,28.3 10.3,27.9 12.05,26.15 L1.2 ; IC1.8 C15.1@26.094,23.905 ; v4(25.9,22.5) 25.9,22.608 26.094,22.802 C15.1@26.094,23.905 ; C15.1 26.273,24.084 C15.1@26.094,23.905
  Bottom Layer w0.6: pad.Conn@1.5,22.7 1.6,22.7 2.7,23.8 3.375,23.8 R5.2 ; pad.Motor@5.9,1.5 6.1,1.7 6.1,2.809 7.075,3.785 7.075,4.183 7.079,4.187 7.079,4.912 10.117,7.95 10.65,7.95 D1.2
+5_CLEAN: C8.1 D1.3 U3.3 | length 12
  Bottom Layer w0.6: C8.1 U3.3 4.35,10.2 4.35,11.202 5.506,12.358 8.208,12.358 9.65,10.916 9.65,10.848 10.498,10 D1.3@11.3,10
+5_USB: D1.1 J1.A4 J1.A9 J1.B4 J1.B9 R3.1 | length 26.2
  Top Layer w0.5: J1.A4 J1.B9 12.896,5.254 12.896,4.932 13.382,4.446 16.618,4.446 17.104,4.932 17.104,5.254 J1.B4 J1.A9
  Bottom Layer w0.3: D1.1 12.55,7.321 12.754,7.117 12.754,6.993 12.808,6.939 12.808,6.692 J1.A4
  Bottom Layer w0.5: J1.A9 17.146,6.646 17.146,6.968 17.632,7.454 20.055,7.454 20.766,6.744 25.275,6.744 27.504,8.973 27.504,11.421 26.175,12.75 R3.1
BOOT0: BOOT0.A BOOT0.A' R2.2 U1.60 | length 28.9
  Top Layer w0.2: v1(3.4,5.2) 4.1,5.2 4.5,5.6 4.5,7.7 6.052,9.252 6.052,11.513 5.664,11.9 4.9,11.9 4.5,12.3 4.5,13.889 4.1,14.289 v1(3.611,14.289)
  Bottom Layer w0.2: v1(3.4,5.2) 3.425,5.175 4.25,5.175 4.575,4.85 R2.2 ; v1(3.611,14.289) 4.165,14.844 8.176,14.844 8.3,14.967 8.3,17.428 8.044,17.684 8.044,20.145 8.368,20.47 8.923,20.47 10.043,19.35 U1.60
CC: J1.A5 J1.B5 R12.1 | length 14.9
  Top Layer w0.2: v1(9.7,5.5) 9.7,6.557 10.447,7.304 13.156,7.304 13.725,6.735 J1.A5
  Bottom Layer w0.2: R12.1 R12.1@9.25,4.525 ; v1(9.7,5.5) 9.7,5.446 9.575,5.321 9.575,4.85 R12.1@9.25,4.525 ; J1.B5 16.275,5.165 15.201,4.091 10.342,4.091 10.233,4.2 9.575,4.2 R12.1@9.25,4.525
CPOUT: C5.1 U2.20 | length 1.5
  Top Layer w0.2: U2.20 C5.1
CURRENT_PAD: pad.Motor@24.1,28.5 U1.11 | length 7.8
  Top Layer w0.2: v1(21.392,26.252) 21.952,26.252 24.1,28.4 pad.Motor@24.1,28.5
  Bottom Layer w0.2: U1.11 19.15,24.309 19.196,24.355 19.196,24.48 20.93,26.214 21.354,26.214 v1(21.392,26.252)
D+: R10.1 U1.45 | length 2.7
  Bottom Layer w0.2: R10.1@14.45,9.625 15.65,10.825 U1.45
D-: R11.1 U1.44 | length 2.3
  Bottom Layer w0.2: R11.1@16.15,9.775 U1.44
  Bottom Layer w0.3: R11.1 R11.1@16.15,9.775
D_NEG: J1.A7 J1.B7 R11.2 | length 3.4
  Bottom Layer w0.3: J1.B7 14.642,5.342 14.642,5.523 15.358,6.239 J1.A7@15.358,6.63 ; J1.A7 15.475,6.675 15.475,7.7 15.75,7.975 R11.2
D_POS: J1.A6 J1.B6 R10.2 | length 3.2
  Top Layer w0.3: J1.A6 14.642,6.558 14.642,6.377 15.358,5.661 15.358,5.342 J1.B6
  Bottom Layer w0.3: R10.2@14.25,7.975 14.3,7.975 14.575,7.7 J1.A6
GND: BOOT0.1 C1.2 C2.2 C3.2 C4.2 C5.2 C7.2 C8.2 C9.2 C10.2 C11.2 C12.2 C13.2 C14.2 C15.2 C16.2 D2.1 IC1.5 J1.A1 J1.A12 J1.B1 J1.B12 LED1.2 LED2.2 pad.- pad.Conn@1.5,10.1 pad.Conn@1.5,15.7 pad.Conn@1.5,21.3 pad.Motor@7.3,28.5 pad.Motor@8.7,1.5 pad.Motor@19.9,28.5 pad.Motor@24.1,1.5 pad.MountBL pad.MountBR pad.MountTL pad.MountTR Q1.3 R2.1 R4.1 R12.2 R13.2 RESET.1 RESET.B RESET.B' U1.12 U1.18 U1.63 U2.1 U2.11 U2.18 U3.1 Y1.2 | length 116.2
  Top Layer w0.2: U2.11 15.75,11.642 16.08,11.312 16.08,9.975 15.401,9.296 C4.2 16.529,9.296 17.133,9.9 v2(17.229,9.9) ; v2(18.5,17.5) 18.5,16.273 C7.2 ; IC1.5 24.383,20.024 25.29,20.024 26.743,18.57 26.743,16.443 v2(26.7,16.4)
  Top Layer w0.3: D2.1 D2.1@7.2,18.9 ; v4(10.5,16.3) 10.55,16.25 U2.1 13,17.654 13.31,17.965 13.31,18.676 14.329,19.696 15.468,19.696 C5.2 15.901,19.977 17,18.879 v2(17,17.03) ; U2.18 v2@17,16.83
  Top Layer w0.6: pad.MountBL 2.459,2.459 4.08,2.459 4.792,3.171 v4(4.9,3.171) ; pad.MountTL 3.825,26.175 3.825,25.35 LED2.2 4.062,25.088 4.062,22.812 LED1.2 ; v4@4.938,3.209 4.977,3.248 4.977,4.411 5.4,4.834 5.4,5.6 BOOT0.1 ; D2.1 7.1,19.25 v4(7.1,20.4) ; RESET.B' v4(26.5,9.4) RESET.B 26.4,6.7 RESET.1 24.5,5.5 pad.MountBR ; pad.MountTR@27.558,28 pad.MountTR ; C15.2 27.864,24.236 pad.MountTR@27.864,27.864
  Bottom Layer w0.2: v2(4.9,19.6) Q1.3 ; C12.2@8.673,21.149 8.898,20.924 9.111,20.924 9.565,20.47 10.689,20.47 11.069,20.85 U1.63 ; v2(12.662,27.804) 13.178,27.289 14.961,27.289 15.5,26.75 Y1.2 ; U1.12 19.65,24.292 20.762,25.404 v2(21.433,25.404) ; U1.18 24.466,20.85 24.583,20.967 24.583,21.45 24.229,21.804 23.677,21.804 23.47,22.011 23.47,23.348 24.149,24.027 C14.2 ; v2(26.7,16.4) 26.777,16.323 26.777,16.098 27.825,15.05 R4.1
  Bottom Layer w0.5: v5(6.984,11.404) 7.041,11.346 7.154,11.346 8.5,10 U3.1 ; C16.2 20.227,8.349 20.774,7.802 21.871,7.802 C1.2 C2.2 24.349,7.573 23.52,8.402 23.52,10.244 24.049,10.773 C10.2 ; C2.2@24.651,7.573 26.479,9.4 v4(26.5,9.4)
  Bottom Layer w0.6: pad.MountBL pad.MountBL@2.459,2.459 ; C8.2 C9.2 6.212,6.36 6.212,4.612 R2.1 6.1,4.475 6.1,4.225 5.123,3.248 4.977,3.248 v4(4.9,3.171) ; v4(7.1,20.4) 7.208,20.4 7.932,21.124 8.497,21.124 C12.2 C13.2 ; pad.Motor@8.7,1.5 8.85,1.65 8.85,2.75 8.975,2.875 R12.2 ; v2(9.754,12.512) 9.812,12.512 10.573,11.751 C11.2 ; R13.2 22.957,2.875 23.9,1.932 23.9,1.7 pad.Motor@24.1,1.5 ; C14.2 v2(24.3,25.507) ; C3.2 25.627,4.249 27.876,2 pad.MountBR
GYRO_CS: R1.1 U1.20 U2.8 | length 27.6
  Top Layer w0.2: U2.8 14.25,11.784 13.966,11.5 13.966,8.546 14.666,7.846 17.571,7.846 21.346,11.621 21.346,15.446 21.513,15.613 21.513,17.214 21.513,17.426 21.987,17.9 v1(24.704,17.9)
  Bottom Layer w0.2: U1.20 25.525,19.85 R1.1 25.8,18.85 24.888,17.938 24.742,17.938 v1(24.704,17.9)
GYRO_INT: U1.24 U2.12 | length 21
  Top Layer w0.2: U2.12 16.25,12.3 17.716,10.834 18.003,10.834 v1(18.041,10.796)
  Bottom Layer w0.2: v1(18.041,10.796) 18.08,10.758 18.08,10.637 18.529,10.188 20.096,10.188 20.448,10.54 22.015,10.54 22.454,10.979 22.454,12.721 21.779,13.396 20.355,13.396 18.963,14.788 18.963,15.247 20.064,16.348 22.002,16.348 22.621,16.967 22.621,17.721 22.75,17.85 U1.24
GYRO_SCL: U1.21 U2.23 | length 11.9
  Top Layer w0.2: U2.23 14.268,16.993 14.268,17.796 14.762,18.29 14.762,18.855 14.58,19.037 v1(14.58,19.092)
  Bottom Layer w0.2: v1(14.58,19.092) 14.937,18.734 18.761,18.734 19.381,19.354 23.646,19.354 U1.21
GYRO_SDA: U1.23 U2.24 | length 11.5
  Top Layer w0.2: U2.24 13.75,17.692 13.814,17.756 13.814,18.126 v1(14.208,18.52)
  Bottom Layer w0.2: v1(14.208,18.52) 14.262,18.52 14.502,18.28 18.949,18.28 19.12,18.452 21.377,18.452 21.652,18.176 22.314,18.176 22.488,18.35 U1.23
GYRO_SDO: U1.22 U2.9 | length 26.5
  Top Layer w0.2: U2.9 14.75,11.642 14.42,11.312 14.42,8.734 14.537,8.617 16.492,8.617 17.121,9.246 17.5,9.246 18.72,10.466 18.72,10.703 v1(18.758,10.742) ; v1(20.959,17.444) 20.997,17.482 20.997,17.8 v1(21.927,18.73)
  Bottom Layer w0.2: v1(18.758,10.742) 20.008,10.742 20.292,11.026 21.859,11.026 22,11.167 22,12.533 21.591,12.942 20.167,12.942 18.509,14.6 18.509,15.435 20.48,17.405 20.921,17.405 v1(20.959,17.444) ; v1(21.927,18.73) 21.981,18.73 22.101,18.85 U1.22
ILIM: IC1.1 R9.1 | length 2.5
  Top Layer w0.6: R9.1 18.475,23.93 18.5,23.905 IC1.1
LED1: R7.1 U1.56 | length 7.8
  Top Layer w0.2: v1(8.598,19.916) 9.325,20.643 R7.1
  Bottom Layer w0.2: v1(8.598,19.916) 11.163,17.35 U1.56
LED2: R8.1 U1.57 | length 10.6
  Top Layer w0.2: R8.1 9.325,24.85 10.496,23.679 v1(10.496,22.5)
  Bottom Layer w0.2: v1@10.506,22.49 10.517,22.5 12.033,22.5 13.1,21.433 13.1,17.967 12.983,17.85 U1.57
NetC6_2: C6.2 C7.1 | length 2.6
  Top Layer w0.3: C6.2 20.121,13.894 20.121,16.106 C7.1
NetLED1_1: LED1.1 R7.2 | length 1.5
  Top Layer w0.3: LED1.1 R7.2
NetLED2_1: LED2.1 R8.2 | length 1.5
  Top Layer w0.3: LED2.1 R8.2
NetQ1_1: Q1.1 R6.1 | length 4.1
  Bottom Layer w0.2: R6.1 5.683,22.275 6.008,21.95 6.008,18.608 Q1.1
NRST: C3.1 RESET.A RESET.A' U1.7 | length 32.3
  Top Layer w0.2: v1(17.704,21.996) v1(17.704,24.931) ; v1(20.8,21.996) 20.146,21.342 20.146,20.205 21.066,19.284 22.157,19.284 22.779,18.662 24.725,18.662 25.258,18.129 25.258,17.671 24.933,17.346 24.624,17.346 22.892,15.614 22.892,13.792 RESET.A' ; RESET.A 22.9,6.2 22.9,4.554 23,4.454 v1(23,4.4)
  Top Layer w0.3: RESET.A RESET.A'
  Bottom Layer w0.2: U1.7 17.15,24.377 v1(17.704,24.931) ; v1(17.704,21.996) v1(20.8,21.996) ; v1(23,4.4) C3.1
OSD_CS: pad.Conn@28.5,17.1 U1.53 | length 51.4
  Top Layer w0.2: v1(11.096,15.316) 8.033,15.316 7.8,15.083 7.8,4.917 9.554,3.163 9.554,1.849 10.342,1.061 19.658,1.061 20.21,1.613 20.21,5.11 v1(20.8,5.7)
  Bottom Layer w0.2: v1(11.096,15.316) 11.134,15.354 11.134,15.634 11.35,15.85 U1.53 ; v1(20.8,5.7) 25.086,5.7 28.45,9.064 28.45,17.05 pad.Conn@28.5,17.1
OSD_DIN: pad.Conn@28.5,21.3 U1.4 | length 21.3
  Bottom Layer w0.2: U1.4 15.65,22.45 15.767,22.333 17.257,22.333 17.475,22.55 21.883,22.55 22.108,22.775 22.108,23.912 22.541,24.346 22.541,25.957 23.653,27.069 25.356,27.069 28.25,24.175 28.25,21.55 pad.Conn@28.5,21.3
OSD_DOUT: pad.Conn@28.5,19.9 U1.3 | length 23.7
  Bottom Layer w0.2: U1.3 15.15,22.308 16.016,21.442 21.417,21.442 22.562,22.587 22.562,23.724 22.995,24.158 22.995,25.769 23.841,26.615 25.168,26.615 27.208,24.575 27.208,20.392 27.7,19.9 pad.Conn@28.5,19.9
OSD_SCK: pad.Conn@28.5,18.5 U1.2 | length 25.4
  Bottom Layer w0.2: U1.2 14.65,22.166 15.828,20.988 21.605,20.988 23.016,22.399 23.016,23.536 23.449,23.97 23.449,25.581 24.029,26.161 24.98,26.161 26.754,24.387 26.754,19.346 27.6,18.5 pad.Conn@28.5,18.5
PWM_IN: pad.Motor@25.5,28.5 U1.40 | length 53.4
  Top Layer w0.2: v1(3,25.704) 3,21.925 v1(3.575,21.35) ; v1(3.196,18.3) 3.204,18.292 3.204,16.259 3.807,15.656 4.627,15.656 5.2,15.083 5.2,13.606 5.694,13.112 v1(6.2,13.112) ; v1(4.5,26.7) 8.869,26.7 8.946,26.777 v1(9,26.777) ; v1(13.8,28.1) 14.9,29.2 v1(16.5,29.2)
  Bottom Layer w0.2: v1(3,25.704) 3.996,26.7 v1(4.5,26.7) ; v1(3.196,18.3) 3.196,19.624 3.575,20.003 v1(3.575,21.35) ; v1(6.2,13.112) 6.254,13.112 6.308,13.166 10.083,13.166 10.761,12.488 13.755,12.488 13.917,12.65 17.883,12.65 18,12.533 18,12.45 18.1,12.35 18.1,11.9 U1.40 ; v1(9,26.777) 9.769,27.546 11.149,27.546 12.061,28.458 13.442,28.458 v1(13.8,28.1) ; v1(16.5,29.2) 17.746,29.2 19.4,27.546 24.646,27.546 25.5,28.4 pad.Motor@25.5,28.5
REGOUT: C4.1 U2.10 | length 2.3
  Top Layer w0.2: C4.1 U2.10
RES_IN: U1.5 Y1.1 | length 3.9
  Bottom Layer w0.2: Y1.1 14.3,25.25 14.85,24.7 15.7,24.7 16.15,24.25 U1.5
RES_OUT: U1.6 Y1.3 | length 2.7
  Bottom Layer w0.2: U1.6 16.65,25.95 Y1.3
RSSI_PAD: pad.Motor@5.9,28.5 U1.10 | length 19.4
  Top Layer w0.2: v1(13.604,26.596) 14.007,26.999 14.007,27.507 v1(15.1,28.6)
  Bottom Layer w0.2: pad.Motor@5.9,28.5 5.9,27.6 7.277,26.223 9.549,26.223 9.922,26.596 v1(13.604,26.596) ; v1(15.1,28.6) 15.665,28.6 16.073,28.192 16.583,28.192 18.712,26.063 18.712,24.513 18.65,24.451 U1.10
S1: pad.Motor@22.7,1.5 U1.17 | length 38
  Top Layer w0.2: v1(22.067,17.196) 22.067,15.35 21.8,15.083 21.8,2.454 22.7,1.554 pad.Motor@22.7,1.5
  Bottom Layer w0.2: v1(22.067,17.196) 22.029,17.234 21.952,17.234 21.189,17.998 20.225,17.998 19.073,16.846 18.109,16.846 17.271,17.684 14.26,17.684 13.654,18.29 13.654,18.949 14.35,19.646 15.203,19.646 15.66,19.188 18.324,19.188 18.944,19.808 21.067,19.808 22.609,21.35 U1.17
S2: pad.Motor@21.3,28.5 U1.26 | length 17.7
  Top Layer w0.2: pad.Motor@21.3,28.5 21.3,28.269 20.779,27.748 20.779,22.8 22.123,21.457 22.123,20.914 23.466,19.57 25.102,19.57 26.166,18.506 26.166,17.157 v1(25.47,16.461)
  Bottom Layer w0.2: U1.26 23.662,16.838 25.093,16.838 v1(25.47,16.461)
S3: pad.Motor@7.3,1.5 U1.27 | length 31.8
  Top Layer w0.2: v1(22.484,3.684) 23.068,3.684 23.8,4.417 23.8,15.096 v1(24.88,16.176)
  Bottom Layer w0.2: pad.Motor@7.3,1.5 7.3,2.558 8.379,3.637 22.295,3.637 22.304,3.646 22.445,3.646 v1(22.484,3.684) ; U1.27 24.651,16.35 24.826,16.176 v1(24.88,16.176)
S4: pad.Motor@8.7,28.5 U1.16 | length 18.3
  Bottom Layer w0.2: pad.Motor@8.7,28.5 8.7,28.554 9.6,29.454 15.463,29.454 16.271,28.646 17.658,28.646 19.212,27.092 21.336,27.092 22.087,26.341 22.087,24.571 21.65,24.134 U1.16
SBUS: pad.Conn@1.5,12.9 R6.2 | length 13.8
  Bottom Layer w0.2: pad.Conn@1.5,12.9 1.6,12.9 2.603,13.903 2.603,14.707 3.292,15.396 3.292,16.684 5.35,18.742 5.35,19.058 5.554,19.262 5.554,21.204 5.272,21.485 5.007,21.485 4.725,21.767 4.725,22.783 5.025,23.083 5.025,23.6 5.35,23.925 R6.2
SHIELD: J1.1 J1.2 J1.3 J1.4 R13.1 | length 17.9
  Top Layer w0.6: J1.1 J1.3 J1.4 J1.2
  Bottom Layer w0.6: J1.2 19.325,4.976 19.651,4.65 20.875,4.65 R13.1
SW2: D2.2 IC1.4 L1.1 | length 12
  Top Layer w0.3: D2.2 11.775,19.625 12.833,19.625 14.368,21.16 15.26,21.16 L1.1@16.15,22.05 ; L1.1 L1.1@16.15,22.05 ; IC1.4 18.45,20.095 18.275,20.27 18.275,20.349 17.37,21.254 16.946,21.254 L1.1@16.15,22.05
SWCLK: pad.Conn@1.5,5.9 U1.49 | length 21
  Top Layer w0.2: pad.Conn@1.5,5.9 1.6,5.9 2.5,6.8 v1(2.5,12.2) ; v1(3.846,16.4) 9,16.4 9.163,16.237 v1(9.217,16.237)
  Bottom Layer w0.2: v1(2.5,12.2) 3.057,12.757 3.057,14.519 3.846,15.308 v1(3.846,16.4) ; v1(9.217,16.237) 9.256,16.199 9.256,15.944 11.35,13.85 U1.49
SWDIO: pad.Conn@1.5,4.5 U1.46 | length 21.7
  Top Layer w0.2: v1(4.1,1.5) 4.917,2.317 5.263,2.317 6.816,3.871 v1(7.829,3.871) ; v1(11.732,8.007) 11.732,9.255 v1(12.858,10.381)
  Bottom Layer w0.2: pad.Conn@1.5,4.5 2.4,4.5 4.1,2.8 v1(4.1,1.5) ; v1(7.829,3.871) 7.804,3.896 7.804,4.712 10.291,7.199 10.925,7.199 v1(11.732,8.007) ; v1(12.858,10.381) 12.892,10.346 14.529,10.346 15.15,10.967 U1.46
UART1_RX: pad.Conn@1.5,14.3 Q1.2 R5.1 U1.43 | length 54.2
  Top Layer w0.2: v1(4.146,20.271) 4.146,19.021 5.342,17.825 8.158,17.825 9.022,18.689 9.022,19.355 9.886,20.219 12.702,20.219 13.604,21.121 v1(13.604,21.886) ; v1(20.7,20.434) 21.96,20.434 23.278,19.116 24.914,19.116 25.712,18.318 25.712,17.482 25.122,16.892 24.813,16.892 23.346,15.425 23.346,11.596 23.104,11.354 v1(23.104,11.3)
  Bottom Layer w0.2: pad.Conn@1.5,14.3 1.554,14.3 2.838,15.583 2.838,17.113 3.95,18.225 Q1.2@3.95,18.267 ; R5.1 3.75,22.275 4.075,21.95 4.075,21.633 4.146,21.562 4.146,18.646 Q1.2 ; v1(13.604,21.886) 15.848,19.642 17.872,19.642 18.664,20.434 v1(20.7,20.434) ; U1.43 16.65,11.029 17.125,10.554 17.5,10.554 18.32,9.734 20.335,9.734 20.687,10.086 22.203,10.086 23.066,10.949 23.066,11.262 v1(23.104,11.3)
UART1_TX: U1.42
UART3_RX: pad.Conn@1.5,19.9 U1.30 | length 39
  Top Layer w0.2: v1(7.197,21.674) 7.932,21.674 8.394,22.136 8.394,25.552 8.817,25.975 9.833,25.975 10.348,25.46 10.348,25.032 v1(10.387,24.993) ; v1(16.932,20.196) 16.932,19.66 17.654,18.937 17.654,15.727 18.363,15.017 v1(19.517,15.017)
  Bottom Layer w0.2: pad.Conn@1.5,19.9 1.6,19.9 2.451,20.751 2.451,20.797 2.454,20.8 2.454,22.612 2.878,23.036 3.994,23.036 4.418,23.46 4.418,24.126 4.842,24.55 6.358,24.55 7.197,23.711 v1(7.197,21.674) ; v1(10.387,24.993) 11.28,24.993 14.158,22.116 14.158,22.016 15.978,20.196 v1(16.932,20.196) ; v1(19.517,15.017) 19.571,15.017 19.794,15.24 21.277,15.24 21.667,14.85 U1.30
UART3_TX: pad.Conn@1.5,18.5 U1.29 | length 27.7
  Top Layer w0.2: pad.Conn@1.5,18.5 1.524,18.524 2.636,18.524 2.967,18.854 3.671,18.854 5.154,17.371 12.004,17.371 12.806,18.174 12.806,18.885 14.577,20.656 15.822,20.656 15.916,20.75 17.161,20.75 17.771,20.14 17.771,19.841 20.532,17.08 20.539,17.08 20.656,16.963 20.656,16.102 20.91,15.848 v1(20.91,15.794)
  Bottom Layer w0.2: v1(20.91,15.794) 21.835,15.794 22.279,15.35 U1.29
UART6_RX: pad.Conn@1.5,8.7 U1.38 | length 22.7
  Bottom Layer w0.2: pad.Conn@1.5,8.7 1.6,8.7 2.496,9.596 2.496,11.361 5.525,14.39 6.253,14.39 7.022,13.62 10.271,13.62 10.949,12.942 13.567,12.942 13.729,13.104 18.721,13.104 19.15,12.675 U1.38
UART6_TX: pad.Conn@1.5,7.3 U1.37 | length 28.1
  Top Layer w0.2: v1(5.754,13.836) 5.769,13.836 6.153,14.22 v1(7.206,14.22)
  Bottom Layer w0.2: pad.Conn@1.5,7.3 1.6,7.3 2.95,8.65 2.95,11.032 v1(5.754,13.836) ; v1(7.206,14.22) 10.313,14.22 11.137,13.396 12.729,13.396 13.239,13.906 13.239,16.094 13.75,16.604 16.25,16.604 17.95,14.904 17.95,14.517 19.65,12.817 U1.37
USB_DETECT: R3.2 R4.2 U1.25 | length 7.3
  Bottom Layer w0.2: U1.25 24.55,17.35 24.608,17.292 25.423,17.292 26.024,16.691 26.024,14.951 R4.2
  Bottom Layer w0.3: R4.2 26.175,14.55 26.45,14.275 26.8,14.275 27.825,13.25 R3.2
VBAT_PAD: pad.Motor@4.5,28.5 U1.9 | length 20.1
  Top Layer w0.2: v1(13.604,25.7) 14.461,26.557 14.461,26.943 15.279,27.762 15.362,27.762 v1(15.4,27.8)
  Bottom Layer w0.2: pad.Motor@4.5,28.5 4.5,27.6 6.331,25.769 9.737,25.769 9.969,26.001 13.248,26.001 13.55,25.7 v1(13.604,25.7) ; v1(15.4,27.8) 16.05,27.15 16.983,27.15 18.258,25.875 18.258,24.701 18.15,24.593 U1.9
VCAP_1: C2.1 U1.31 | length 7.8
  Bottom Layer w0.2: U1.31 24.55,14.35 25.55,13.35 25.55,12.242 26.29,11.502 26.29,10.666 24.651,9.027 C2.1
VCAP_2: C1.1 U1.47 | length 14.7
  Top Layer w0.2: v1(13.412,10.9) 13.412,8.458 14.477,7.392 18.777,7.392 v1(20.917,9.532)
  Bottom Layer w0.2: v1(13.412,10.9) 13.45,10.862 13.538,10.862 13.545,10.855 14.355,10.855 14.613,11.113 14.613,11.813 U1.47 ; v1(20.917,9.532) 20.971,9.532 21.097,9.406 21.721,9.406 C1.1
VIN: IC1.2 IC1.3 pad.+ R9.2 | length 12.9
  Top Layer w0.6: pad.+ 17.3,29.075 20,26.375 20,26.125 R9.2 20.125,23.434 19.351,22.66 18.913,22.66 IC1.2 IC1.3
pads on no net: IC1.6 IC1.7 J1.A8 J1.B8 U1.8 U1.14 U1.15 U1.28 U1.33 U1.34 U1.35 U1.36 U1.39 U1.41 U1.50 U1.51 U1.52 U1.54 U1.55 U1.58 U1.59 U1.61 U1.62 U2.2 U2.3 U2.4 U2.5 U2.6 U2.7 U2.14 U2.15 U2.16 U2.17 U2.19 U2.21 U2.22 U2.25 U3.4
copper on no net:
  other v1: 28,4.1 28.6,4.1 28,4.7 28.6,4.7 28,5.3 28.6,5.3 28,5.9 28.6,5.9 28,6.5 28.6,6.5 28,7.1 28.6,7.1
  other v3: 14,14 15,14 16,14 14,15 15,15 16,15 14,16 15,16 16,16

## Polygon pours and split planes (outlines as drawn)
GND on Bottom Layer "GND_L04_P001" (solid, pour order 1): 2,0 cw(c2,2) 0,2 0,28 cw(c2,28) 2,30 9.5,30 ccw(c9.5,30.5) 10,30.5 10,34 cw(c11.5,34) 11.5,35.5 18.5,35.5 cw(c18.5,34) 20,34 20,30.5 ccw(c20.5,30.5) 20.5,30 28,30 cw(c28,28) 30,28 30,2 cw(c28,2) 28,0
GND on Top Layer "GND_L01_P000" (solid, pour order 0): 2,0 cw(c2,2) 0,2 0,28 cw(c2,28) 2,30 9.5,30 ccw(c9.5,30.5) 10,30.5 10,34 cw(c11.5,34) 11.5,35.5 18.5,35.5 cw(c18.5,34) 20,34 20,30.5 ccw(c20.5,30.5) 20.5,30 28,30 cw(c28,28) 30,28 30,2 cw(c28,2) 28,0
+5 on PWR Layer (split plane): 157 vertices, not listed, extent 0.509,0.509 29.491,34.991
GND on GND Layer (split plane): 157 vertices, not listed, extent 0.509,0.509 29.491,34.991

## Keep-outs
Keep-Out Layer:
  lines w0.1: 2,30 ccw(c2,28) 0,28 0,2 ccw(c2,2) 2,0 28,0 ccw(c28,2) 30,2 30,28 ccw(c28,28) 28,30 20.5,30 cw(c20.5,30.5) 20,30.5 20,34 ccw(c18.5,34) 18.5,35.5 11.5,35.5 ccw(c11.5,34) 10,34 10,30.5 cw(c9.5,30.5) 9.5,30 2,30 ; 2,30 2,30

## Silkscreen, mask and mechanical layers (free items; w line width, h text height)
Top Overlay:
  region: 11.3,14.45 10.9,14.05 11.1,14.05 11.1,13.55 11.5,13.55 11.5,14.05 11.7,14.05
  lines w0.1: 1.5,3.8 2.3,3.8 2.3,5.2 2.3,6.6 ; 1.5,6.6 2.3,6.6 ; 1.5,12.2 2.3,12.2 ; 1.5,17.8 2.3,17.8 ; 1.5,23.4 2.3,23.4 2.3,17.8 ; 3.8,28.5 3.8,27.7 ; 5.2,1.5 5.2,2.3 9.4,2.3 9.4,1.5 ; 6.6,27.7 6.6,28.5 ; 10.7,32.3 10.7,29.8 14.7,29.8 14.7,32.4 ; 10.8,28.5 10.8,27.7 9.4,27.7 ; 15.3,32.4 15.3,29.8 19.3,29.8 19.3,32.3 ; 19.2,28.5 19.2,27.7 ; 20.6,1.5 20.6,2.3 24.8,2.3 24.8,1.5 ; 23.4,27.7 23.4,28.5 ; 26.2,28.5 26.2,27.7 25.6,27.7 ; 28.5,16.4 27.7,16.4 27.7,22 28.5,22 ; 2.3,6.6 2.3,12.2 ; 2.3,12.2 2.3,17.8 ; 3.8,27.7 3.8,27.7 ; 3.8,27.7 5.2,27.7 9.4,27.7 ; 9.4,27.7 9.4,27.7 ; 10.9,14.05 11.3,14.45 ; 10.9,14.05 10.9,14.05 ; 10.9,14.05 11.1,14.05 11.1,13.55 11.5,13.55 11.5,14.05 11.7,14.05 11.3,14.45 ; 11.3,14.45 11.3,14.45 ; 19.2,27.7 19.2,27.7 ; 19.2,27.7 20.6,27.7 25.6,27.7 ; 25.6,27.7 25.6,27.7 ; 25.6,27.7 25.6,27.7
  text "-" at 13.208,29.808 h1.52 r180
  text "+" at 17.808,29.8 h1.52 r180
  text "VBAT" at 5.008,27.4 h0.4 r180
  text "RSSI" at 6.566,27.4 h0.4 r180
  text "G" at 7.433,27.4 h0.4 r180
  text "S4" at 9.033,27.4 h0.4 r180
  text "5V" at 10.408,27.4 h0.4 r180
  text "G" at 20.033,27.4 h0.4 r180
  text "S2" at 21.633,27.4 h0.4 r180
  text "5V" at 23.033,27.4 h0.4 r180
  text "CURR" at 24.858,27.4 h0.4 r180
  text "PWM" at 26.233,27.4 h0.4 r180
  text "5V" at 2.6,23.033 h0.4 r270
  text "G" at 2.6,21.433 h0.4 r270
  text "DIN" at 27.4,20.8 h0.4 r90
  text "RX3" at 2.6,20.408 h0.4 r270
  text "DOUT" at 27.4,19.117 h0.4 r90
  text "TX3" at 2.55,19.033 h0.4 r270
  text "SCK" at 27.4,17.817 h0.4 r90
  text "5V" at 2.575,17.408 h0.4 r270
  text "CS" at 27.4,16.767 h0.4 r90
  text "WERNER & RZEPKA" at 4.938,16.551 h0.25
  text "WUST PROJECT" at 5.719,16.151 h0.25
  text "G" at 2.6,15.808 h0.4 r270
  text "F4 FLIGHTCONTROLLER" at 3.951,15.751 h0.25
  text "RX1" at 2.6,14.742 h0.4 r270
  text "SBUS" at 2.6,13.508 h0.4 r270
  text "5V" at 2.6,11.783 h0.4 r270
  text "G" at 2.6,10.233 h0.4 r270
  text "RX6" at 2.6,9.233 h0.4 r270
  text "TX6" at 2.6,7.783 h0.4 r270
  text "CLK" at 2.6,6.383 h0.4 r270
  text "DIO" at 2.6,4.95 h0.4 r270
  text "5V" at 5.567,2.6 h0.4
  text "S3" at 6.967,2.6 h0.4
  text "G" at 8.592,2.6 h0.4
  text "5V" at 20.967,2.6 h0.4
  text "S1" at 22.433,2.6 h0.4
  text "G" at 23.992,2.6 h0.4
Bottom Overlay:
  text "JLCJLCJLCJL" at 18.199,1.9 h0.6